# Altium PCB T962a_Panel.PcbDoc
Units mil, origin at the board's own origin, x right, y up, seen from the top; angles counter-clockwise.
Board outline 2996.57 x 896.22 mil, 2 copper layers (Top Layer, Bottom Layer); 17 components, 21 nets, 67 pads, 16 vias.
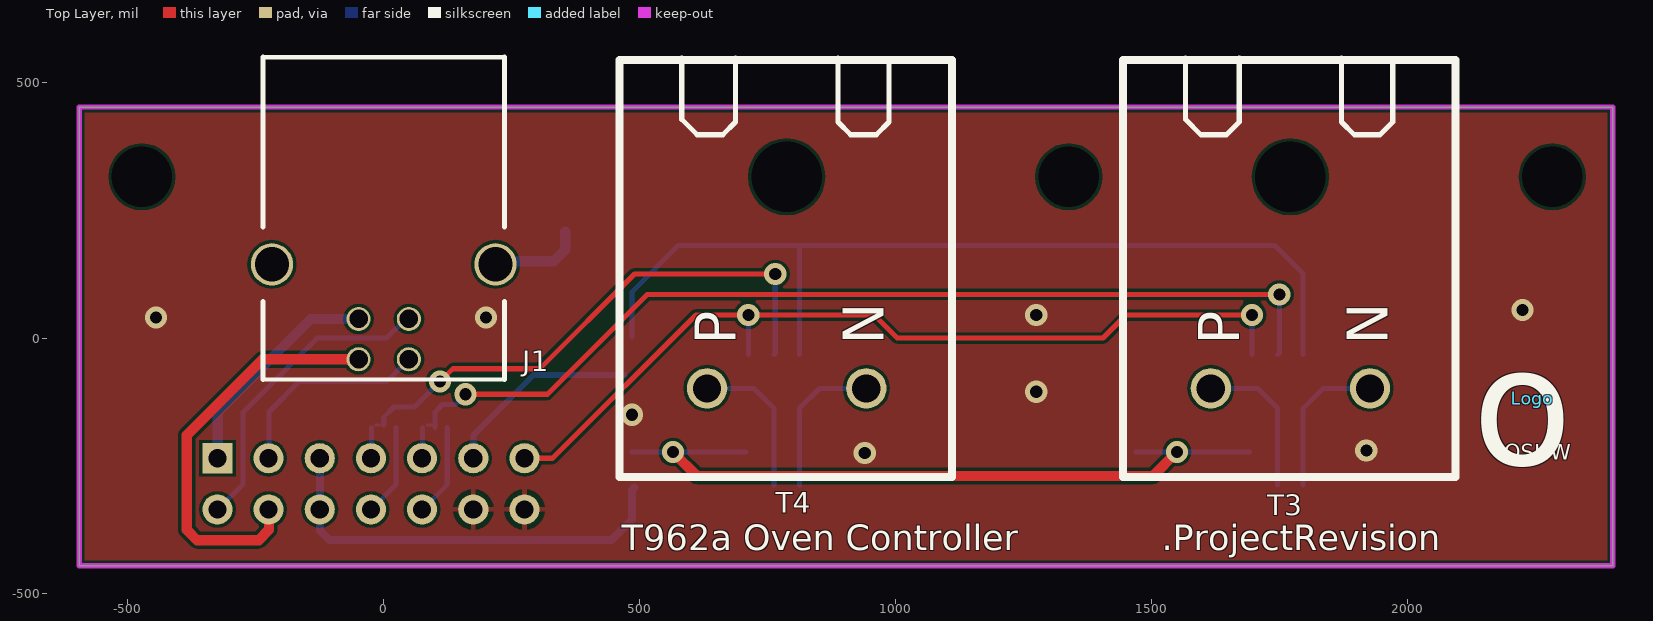
[diagram p0: Top Layer view]
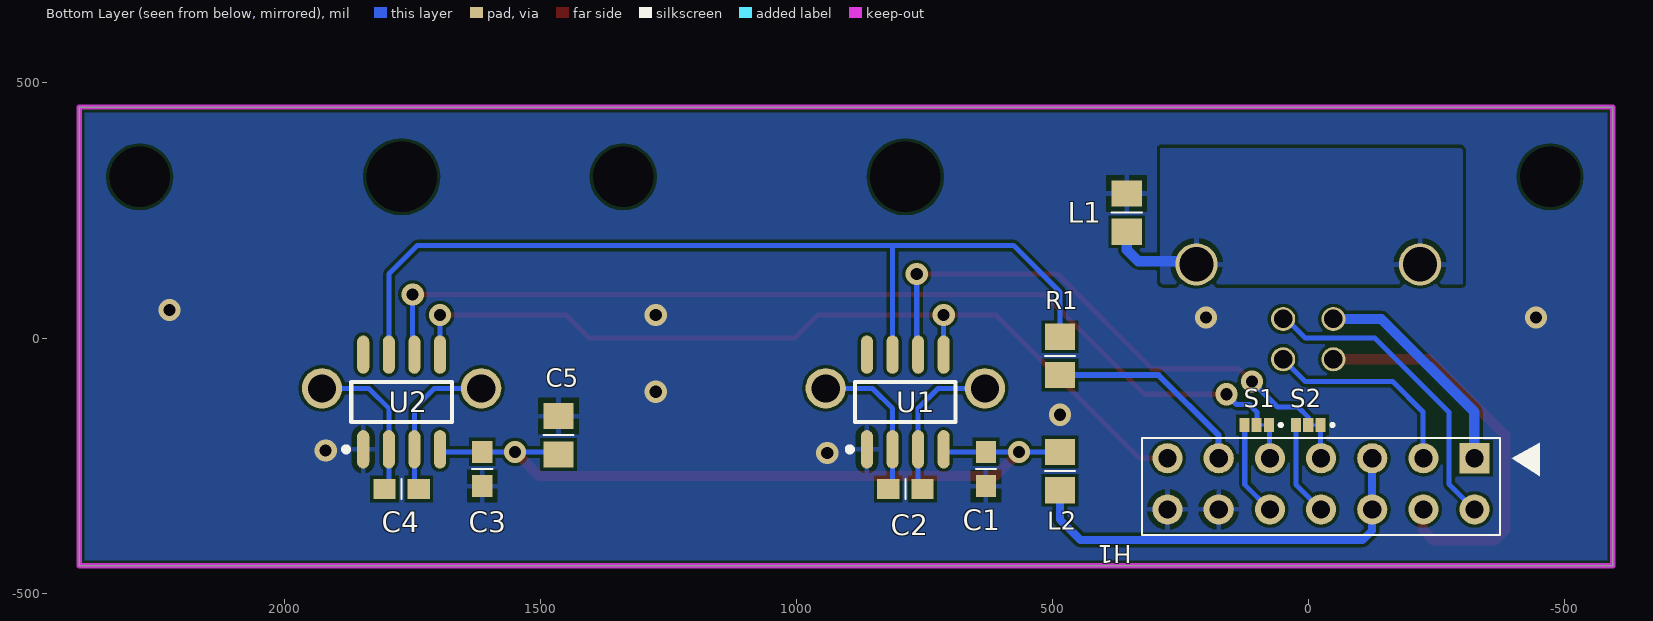
[diagram p1: Bottom Layer view, seen from below]
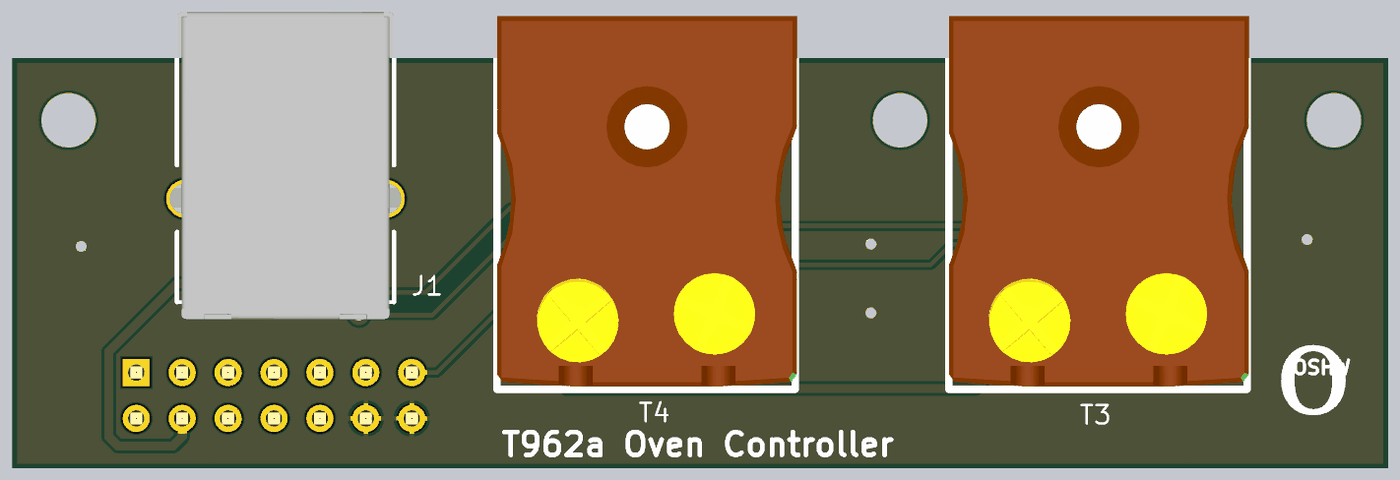
[diagram p2: 3D render of the assembled board from above, using the file's embedded part models]
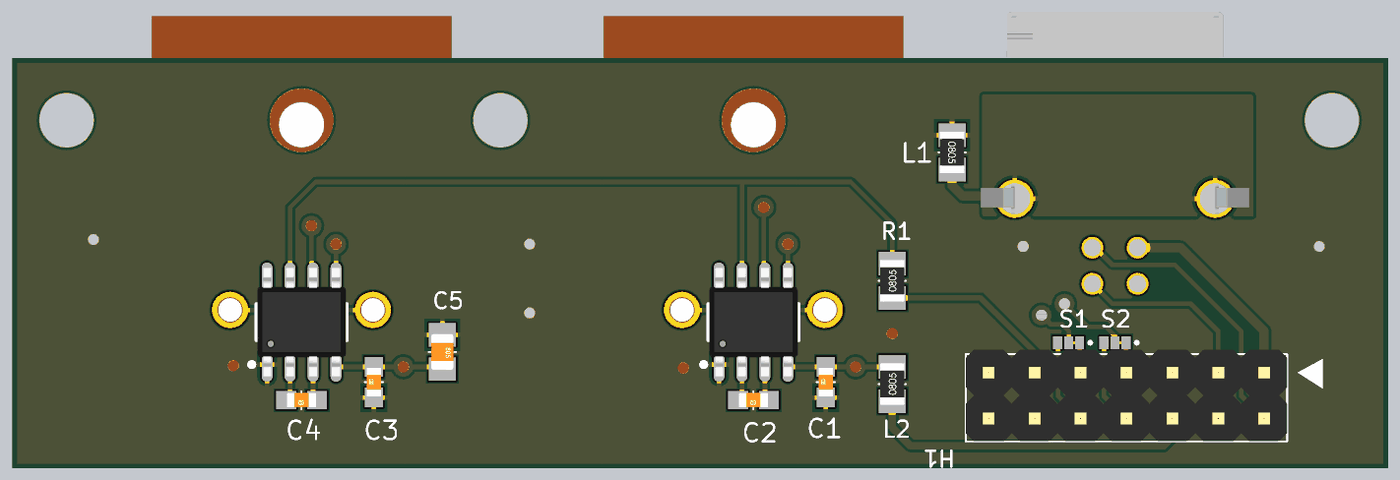
[diagram p3: 3D render of the assembled board from below, using the file's embedded part models]

## Layer stack, top to bottom
Top Solder: solder mask 0.4, Solder Resist, Dk 3.5
Top Layer: signal copper 1.4
Dielectric 1: dielectric 12.6, FR-4, Dk 4.8
Bottom Layer: signal copper 1.4
Bottom Solder: solder mask 0.4, Solder Resist, Dk 3.5

## Board outline
-595,-445.04 -595,451.18 2401.57,451.18 2401.57,-445.04

## Design rules (kind name [scope] priority, off if disabled: settings)
Clearance [All] p1: gap=6
HoleSize [All] p1: absolutevalues=TRUE maxlimit=350 minlimit=1 maxpercent=80.000 minpercent=20.000
PlaneConnect PlaneConnect_Poly [IsVia] p1: planeconnectstyle=Direct reliefexpansion=20 reliefentries=4 reliefconductorwidth=10 reliefairgap=10
PlaneConnect [All] p2: planeconnectstyle=Relief reliefexpansion=20 reliefentries=4 reliefconductorwidth=10 reliefairgap=10
PolygonConnect PolygonConnect_Poly [IsVia] p1: connectstyle=Direct reliefconductorwidth=10 reliefentries=4 polygonreliefangle="90 Angle" airgapwidth=10
PolygonConnect [All] p2: connectstyle=Relief reliefconductorwidth=10 reliefentries=4 polygonreliefangle="90 Angle" airgapwidth=10
RoomDefinition T962a_Panel [InComponentClass('T962a_Panel')] p1: confinementstyle=ConfineIn formatcopy=TRUE lockcomponents=FALSE outline -669.29,-675.04 2480.32,-675.04 2480.32,584.96 -669.29,584.96
RoutingVias [All] p1: holewidth=28 width=50 viastyle="Through Hole" minholewidth=28 minwidth=50 maxholewidth=28 maxwidth=50
SilkToBoardRegionClearance [All] p1 off:
SilkToSolderMaskClearance [IsPad] p1: minsilkscreentomaskgap=5 clearancetoexposedcopper=TRUE
SolderMaskExpansion [All] p1: expansion=4
Width [All] p1: maxlimit=40 minlimit=10 preferedwidth=10
26 further rules are at their usual default settings.

## Components (designator, comment, footprint, x,y, rotation, side; value= is the part's Value field where it differs from the comment)
C1 "100nF" CCNP1608-0603 629.92,-255.91 r90 bottom
C2 "10nF" CCNP1608-0603 787.4,-295.28 r0 bottom
C3 "100nF" CCNP1608-0603 1614.17,-255.91 r90 bottom
C4 "10nF" CCNP1608-0603 1771.65,-295.28 r0 bottom
C5 "2u2F" CCNP2012-0805 1465,-190 r270 bottom
H1 "2x5 Header" HDR2X7S -325,-235 r0 bottom (schematic designator J2)
J1 "USB Type B" "USB_BCON - STRAIGHT PINS" 0,51.18 r270 top
L1 "FB" CR2012-0805 354.8,244.96 r270 bottom
L2 "FB" CR2012-0805 485,-260 r90 bottom
Logo "OSHW Logo" OSHW 2244.09,-118.11 r0 top
R1 "85R" CR2012-0805 485,-35 r90 bottom
S1 "Link3Closed" SolderBridge3(Closed) 101,-170 r0 bottom net-tie
S2 "Link3Closed" SolderBridge3(Closed) 0,-170 r0 bottom net-tie
T3 "Thermocouple_PCB" "THERMOCOUPLESOCKET - PCB MOUNT" 1771.65,314.96 r90 top locked
T4 "Thermocouple_PCB" "THERMOCOUPLESOCKET - PCB MOUNT" 787.4,314.96 r90 top locked
U1 "MAX31855KASA+T" SO-8_L 787.4,-125.04 r90 bottom
U2 "MAX31855KASA+T" SO-8_L 1771.65,-125.04 r90 bottom

## Footprints (in the part's own frame and the unit in brackets; to place one, negate y for a bottom-side part, rotate by r counter-clockwise, add the part's x,y. Pads: shape width x height; smd on the part's side, far side on the other; paste and mask are expansions set on the pad)
CCNP1608-0603 [mm]
  rect 1.1x1 smd: 1(-0.85,0) 2(0.85,0)
  silkscreen extent 0,-0.5 0,0.5, body extent -0.8,-0.4 0.8,0.4, height 0.3
CCNP2012-0805 [mm]
  rect 1.3x1.5 smd: 1(-0.95,0) 2(0.95,0)
  silkscreen extent 0,-0.75 0,0.75, body extent -1,-0.62 1,0.63, height 0.78
CR2012-0805 [mm]
  rect 1.3x1.5 smd: 1(-0.95,0) 2(0.95,0)
  silkscreen extent 0,-0.75 0,0.75, body extent -1.15,-0.67 1.15,0.68, height 0.76
HDR2X7S [mm] "Connector; Header; 2x6 Position; Straight"
  rect 1.5x1.5 hole 0.9: 1(0,0)
  round 1.5 hole 0.9: 2(0,2.54) 3(2.54,0) 4(2.54,2.54) 5(5.08,0) 6(5.08,2.54) 7(7.62,0) 8(7.62,2.54) 9(10.16,0) 10(10.16,2.54) 11(12.7,0) 12(12.7,2.54) 13(15.24,0) 14(15.24,2.54)
  silkscreen extent -3.24,-1.02 16.51,3.81, body extent -1.27,-1.27 16.51,3.81, height 6
OSHW [mil] "OSHW Logo"
SO-8_L [mm] "8-Pin Small Outline Integrated Circuit 1.27 mm Pitch, IPC High Density"
  oval 1.9x0.6 smd: 1(-2.35,1.905) 2(-2.35,0.635) 3(-2.35,-0.635) 4(-2.35,-1.905) 5(2.35,-1.905) 6(2.35,-0.635) 7(2.35,0.635) 8(2.35,1.905)
  silkscreen extent -2.47,-2.5 1,2.88, body extent -3,-2.45 3,2.45, height 1.7
SolderBridge3(Closed) [mm]
  rect 0.5x0.7 smd: 1(-0.61,0) 2(0,0) 3(0.61,0)
  Top Layer region: -0.457,0.076 -0.152,0.076 -0.152,-0.076 -0.457,-0.076
  silkscreen extent -1.28,-0.08 -1.12,0.08
"THERMOCOUPLESOCKET - PCB MOUNT" [mm] "Thermocouple Socket"
  round 1.5 hole 3.5: 0(0,0)
  round 2 hole 1.4: N(-10.5,-3.95) P(-10.5,3.95)
  silkscreen extent -14.9,-8.2 5.9,8.3, body extent -14.75,-8.3 5.75,8.3, height 8.58
"USB_BCON - STRAIGHT PINS" [mm] "USB B-type Connector"
  round 1.2 hole 0.92: 5V(2.355,-1.25) D+(0.355,1.25) D-(2.355,1.25) GND(0.355,-1.25)
  round 2.1 hole 1.7: Shield1(-2.355,5.55) Shield2(-2.355,-5.55)
  silkscreen extent -12.63,-6.02 3.37,6.02, body extent -12.7,-7.43 4.3,7.43, height 11

## Part data
C1 C2 C3 C4 C5: library part Cap, "Capacitor"
H1: library part "Header 2x7", "Header 2x7"
J1: library part USB_TYPE_B, "USB B Connector"
L1 L2: library part "Ferrite Bead 0805", "Ferrite Bead (0805) 0.045OHM, 2A"
R1: library part Res, "Resistor"

## Free pads (board coordinates)
  round 98.43 hole 118.11: 0(-472.44,314.96) 0(1338.58,314.96) 0(2283.46,314.96)

## Via types
v1: diameter 43.31, hole 23.62, Top Layer to Bottom Layer, tented both sides, 16 vias

## Nets (pads, with @x,y where several pads share a name; then routed paths per layer and width w, separated by ;. In a path a pad name is that pad's centre, name@x,y a point inside that pad or via, vN(x,y) a via of type N, cw(c..) or ccw(c..) an arc to the next point about the centre after c; other vN are vias at no path point)
3V3: H1.5 H1.6 L2.1 | length 860
  Bottom Layer w15.75: H1.5@-124.41,-235.04 H1.5@-124.41,-249.25 ; H1.5@-110.2,-235.04 H1.5@-124.41,-249.25 ; L2.1@490,-292.44 L2.1 485,-355 444.96,-395.04 -106.04,-395.04 -124.41,-376.67 -124.41,-335.04 H1.5@-124.41,-249.25
GND: C1.1 C3.1 C5.1 H1.12 H1.14 L1.1 U1.1 U2.1
  other v1: 940,-225 1920,-220 485,-150 1275,-105 -445,40 200,40 1275,45 2225,55
MISO: R1.2 U1.7 U2.7 | length 1830.6
  Bottom Layer w10: R1.2 485,90 575.69,180.69 812.4,180.69 ; U1.7 812.4,180.69 ; U2.7 1796.65,125 1740.97,180.69 812.4,180.69
NetH1_11: H1.11 R1.1 | length 388.5
  Bottom Layer w11.81: H1.11@175.59,-235.04 175.59,-189.41 292.6,-72.4 R1.1@470,-72.4
NetJ1_Shield1: J1.Shield1 J1.Shield2 L1.2 | length 189.5
  Bottom Layer w20: J1.Shield1@212.24,143.9 218.31,149.96 332.28,149.96 354.8,172.48 L1.2
SCK: H1.13 U1.5 U2.5 | length 1726.8
  Top Layer w10: H1.13@275.59,-235.04 329.96,-235.04 609.96,44.96 704.02,44.96 v1@708.19,40.79 ; v1(712.4,45) 958.46,45 1003.46,0 1405.59,0 1450.59,45 v1(1696.65,44.96)
  Bottom Layer w10: U1.5 v1(712.4,45) ; U2.5 v1(1696.65,44.96)
T3+: C4.1 T3.P U2.3 | length 296.1
  Bottom Layer w10: T3.P 1707.68,-98.43 1746.65,-137.4 U2.3 C4.1@1746.65,-286.81
T3-: C4.2 T3.N U2.2 | length 296.1
  Bottom Layer w10: C4.2@1796.65,-286.81 U2.2 1796.65,-137.4 1835.63,-98.43 T3.N
T4+: C2.1 T4.P U1.3 | length 296.1
  Bottom Layer w10: T4.P 723.43,-98.43 762.4,-137.4 U1.3 C2.1@762.4,-286.81
T4-: C2.2 T4.N U1.2 | length 296.1
  Bottom Layer w10: C2.2@812.4,-286.81 U1.2 812.4,-137.4 851.38,-98.43 T4.N
T_CS1*: H1.10 S1.3 | length 180.1
  Bottom Layer w10: H1.10@75.59,-335.04 124,-286.63 S1.3@124,-175
T_CS2*: H1.8 S2.3 | length 180.1
  Bottom Layer w10: H1.8@-24.41,-335.04 24,-286.63 S2.3@24,-175
T_CS3*: H1.9 S1.1 | length 59.6
  Bottom Layer w10: H1.9@76,-234.63 S1.1@76,-175
T_CS4*: H1.7 S2.1 | length 59.6
  Bottom Layer w10: H1.7@-24,-234.63 S2.1@-24,-175
T_CSA*: S2.2 U1.6 | length 1054.6
  Top Layer w10: v1(110,-85) 135,-60 304.84,-60 489.84,125 v1(765,125)
  Bottom Layer w10: S2.2 0,-155 20,-135 60,-135 v1(110,-85) ; U1.6 765,-29.92 v1(765,125)
T_CSB*: S1.2 U2.6 | length 1894.2
  Top Layer w10: v1(160,-110) 319.84,-110 514.84,85 v1(1750,85)
  Bottom Layer w10: S1.2@100,-175 100,-145 115,-130 140,-130 v1(160,-110) ; U2.6 1750,-29.17 v1(1750,85)
USB_5V: H1.4 J1.5V | length 793.3
  Top Layer w20: H1.4@-224.41,-335.04 -224.41,-375 -244.45,-395.04 -364.96,-395.04 -385,-375 -385,-189.84 -236.69,-41.54 J1.5V@-55.47,-41.54
USB_DM: H1.3 J1.D- | length 406.9
  Bottom Layer w10: H1.3@-224.41,-235.04 -224.41,-144.41 -165,-85 5.75,-85 J1.D-
USB_DP: H1.2 J1.D+ | length 603.9
  Bottom Layer w10: H1.2@-324.41,-335.04 -275,-285.63 -275,-145 -130,0 5.75,0 J1.D+@42.95,37.2
USB_GND: H1.1 J1.GND | length 441.1
  Bottom Layer w20: H1.1@-324.41,-235.04 -324.41,-144.41 -142.8,37.2 J1.GND
VADC: C1.2 C3.2 C5.2 L2.2 U1.4 U2.4 | length 1468.5
  Top Layer w19.68: v1(565,-222.6) 612.4,-270 1502.44,-270 v1(1550,-222.44)
  Bottom Layer w10: L2.2 v1(565,-222.6) U1.4@707.36,-222.6 ; C5.2@1469.96,-222.44 v1(1550,-222.44) C3.2 U2.4@1691.77,-222.44
pads on no net: T3.0 T4.0 U1.8 U2.8

## Polygon pours and split planes (outlines as drawn)
GND on Bottom Layer "Top Layer-No Net" (solid, remove dead copper, pour order 7): -626.49,-471.14 -626.49,465.09 2440.95,465.09 2440.95,-471.14
NetJ1_Shield1 on Bottom Layer "Top Layer-No Net" (solid, pour order 9): -301.54,104.96 -301.54,371.18 289.02,371.18 289.02,104.96
GND on Top Layer "Top Layer-usb-shield" (solid, remove dead copper, pour order 4): -629.92,485.28 2440.95,485.28 2440.95,-464.72 -629.92,-464.72 -629.92,825.28

## Keep-outs
Keep-Out Layer:
  the board outline again, w10

## Silkscreen, mask and mechanical layers (free items; w line width, h text height)
Top Overlay:
  text "T962a Oven Controller" at 465,-415 h50
  text ".ProjectRevision" at 1520,-415 h50
Mechanical 15:
  lines w62.99: -530.2,-475.04 2079.8,-475.04 2079.8,484.96 -530.2,484.96 -530.2,-475.04

## Dimensions
-472.44,314.96 to 1338.58,314.96 on Mechanical 1
2283.46,314.96 to -472.44,314.96 on Mechanical 1

## Text inside footprints (layer, text, board x,y; h text height)
Logo: Top Overlay "o" at 2323.09,-324.11 h400; Top Overlay "OSHW" at 2189.09,-238.11 h30
T3: Top Overlay "P" at 1671.65,-13.07 h80 r90; Top Overlay "N" at 1961.65,-13.07 h80 r90
T4: Top Overlay "N" at 977.4,-13.07 h80 r90; Top Overlay "P" at 687.4,-13.07 h80 r90